# EAGLE board powerlog (EAGLE 6.2)
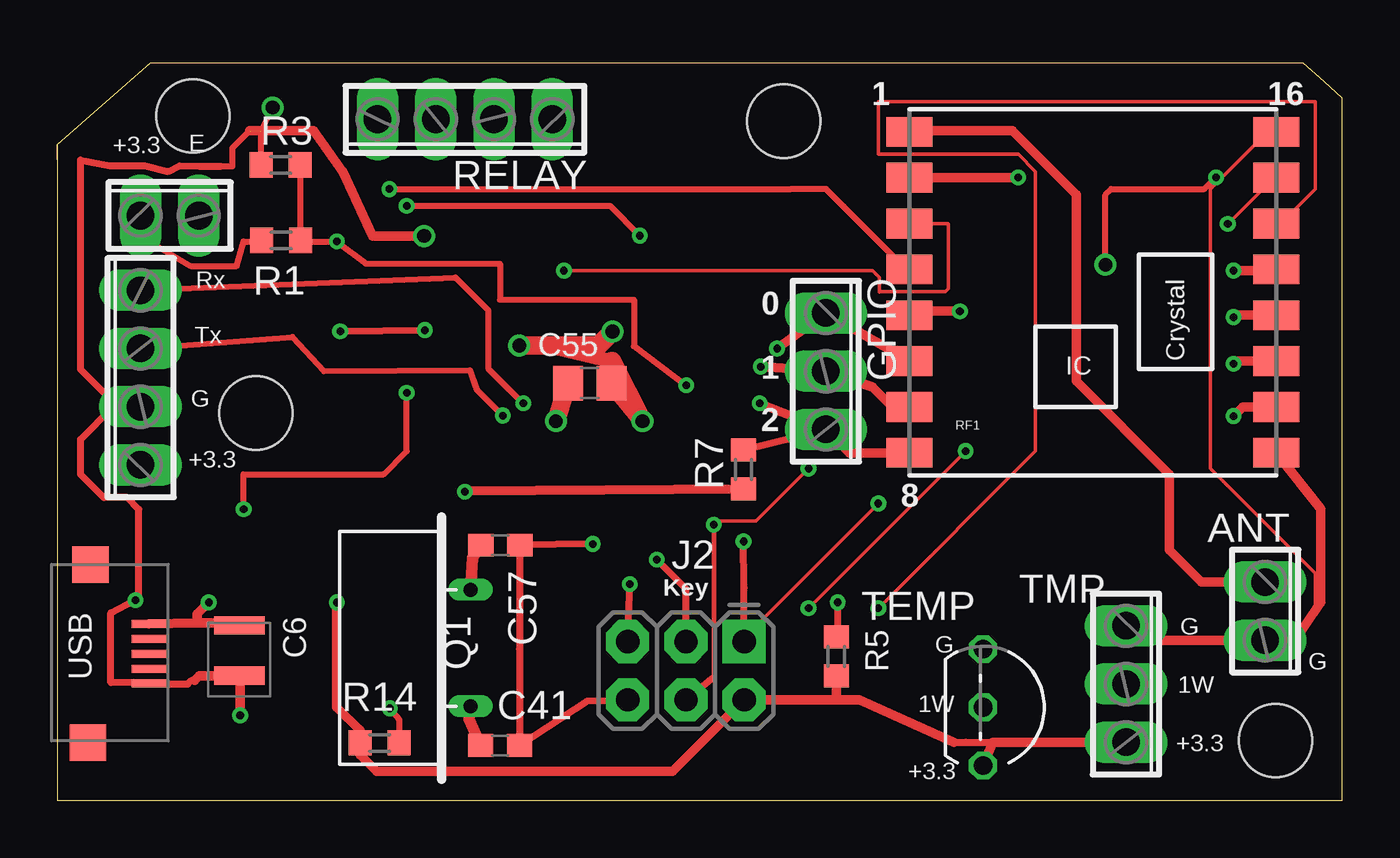
[diagram p0: board, top side]
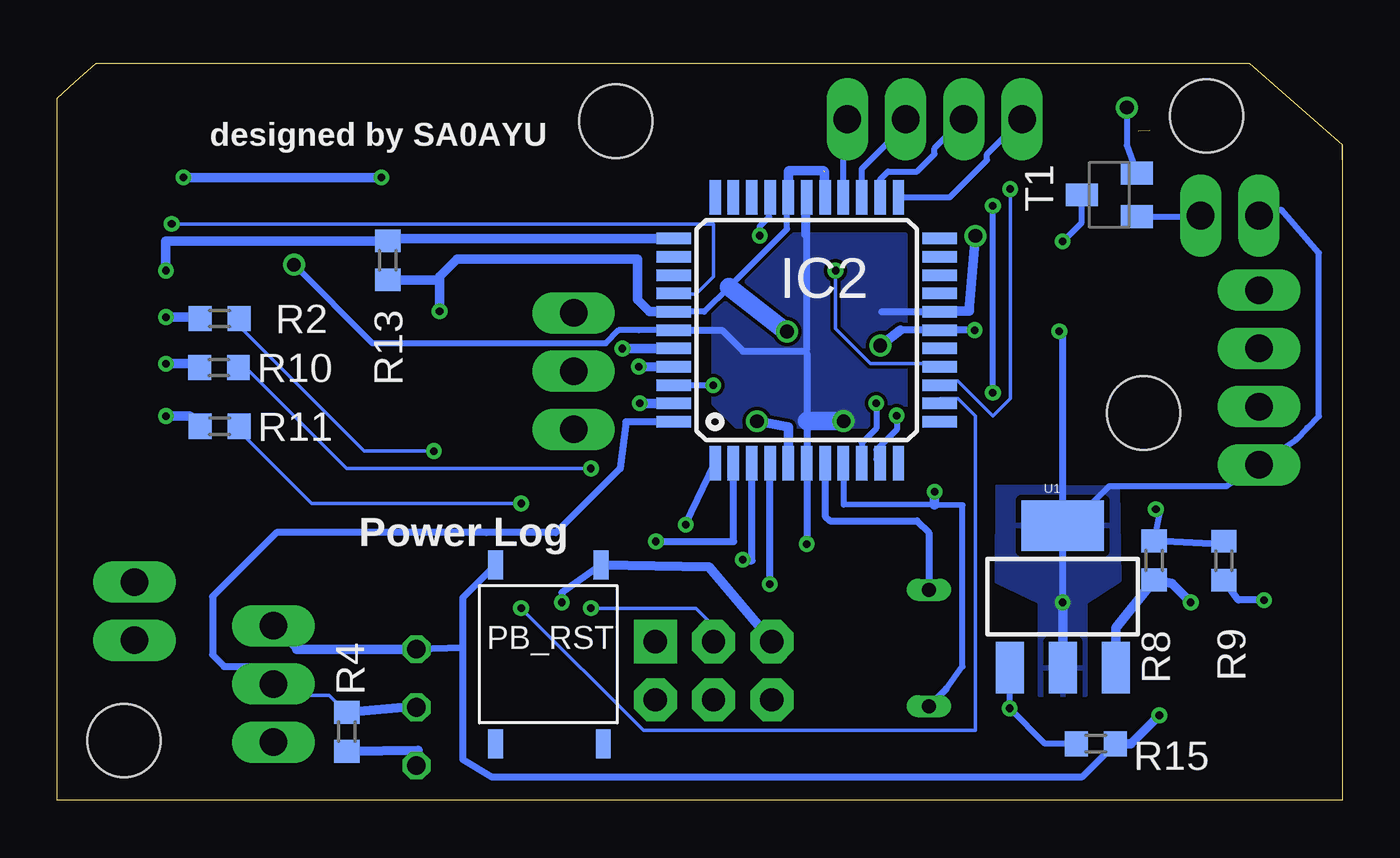
[diagram p1: board, bottom side, seen from below]

Size 56.04 x 32.16 mm. Coordinates in mm from the lower left corner, seen from the top.
Outline: 0,28.62 4.05,32.16 54.34,32.15 55.25,31.34 56.04,30.63 56.04,0 0,0 0,28.62
Outline: 0,28.62 0,27.96 0,28.62
Copper layers (1*16): Top 0.0356mm / dielectric 1.5011mm / Bottom 0.0356mm
Design rules: minimum track width 6mil, minimum drill 13mil, track to track 6mil, track to pad 6mil, pad to pad 6mil, via to via 6mil, smd to smd 6mil, copper to edge 15mil, drill to drill 6mil, minimum pad ring 7mil, minimum via ring 7mil, stop-mask expansion 4mil, vias tented up to drill 0mil, thermal gap 10mil
Holes 3.2 mm at 31.68,29.63 53.14,2.61 8.66,16.9 5.92,29.85

## Footprints (pad centres in the part's own frame; a part is rotated, then mirrored left to right if it is on the bottom)
2POL254 = drill 1.2 long: 1 -1.27,0; 2 1.27,0
SMC_CAP_B = smd 0.8 x 2.2: + -1.37,0.3; - 0.83,0.3
C0603 = smd 1.1 x 1: 1 -0.85,0; 2 0.85,0
C0805 = smd 1.3 x 1.5: 1 -0.95,0; 2 0.95,0
3POL254 = drill 1.2 long: 1 -2.54,0; 2 0,0; 3 2.54,0
TQFP44 = smd 1.5 x 0.5: 1 -5.8,4; 2 -5.8,3.2; 3 -5.8,2.4; 4 -5.8,1.6; 5 -5.8,0.8; 6 -5.8,0; 7 -5.8,-0.8; 8 -5.8,-1.6; 9 -5.8,-2.4; 10 -5.8,-3.2; 11 -5.8,-4; 23 5.8,-4; 24 5.8,-3.2; 25 5.8,-2.4; 26 5.8,-1.6; 27 5.8,-0.8; 28 5.8,0; 29 5.8,0.8; 30 5.8,1.6; 31 5.8,2.4; 32 5.8,3.2; 33 5.8,4 | smd 0.5 x 1.5: 12 -4,-5.8; 13 -3.2,-5.8; 14 -2.4,-5.8; 15 -1.6,-5.8; 16 -0.8,-5.8; 17 0,-5.8; 18 0.8,-5.8; 19 1.6,-5.8; 20 2.4,-5.8; 21 3.2,-5.8; 22 4,-5.8; 34 4,5.8; 35 3.2,5.8; 36 2.4,5.8; 37 1.6,5.8; 38 0.8,5.8; 39 0,5.8; 40 -0.8,5.8; 41 -1.6,5.8; 42 -2.4,5.8; 43 -3.2,5.8; 44 -4,5.8
2X3-NS = drill 1.016 pad 1.88 square: 1 -2.54,-1.27 | drill 1.016 pad 1.88 octagon: 2 -2.54,1.27; 3 0,-1.27; 4 0,1.27; 5 2.54,-1.27; 6 2.54,1.27
PUSHBUTTON = smd 0.635 x 1.27: IN -2.3,4.29; IN2 -2.3,-3.51; OUT 2.3,4.29; OUT2 2.4,-3.51
Q = drill 0.61 long: 1 -2.54,-7.62; 2 2.54,-7.62
R0603 = smd 1 x 1.1: 1 -0.85,0; 2 0.85,0
4POL254 = drill 1.2 long: 1 -3.81,0; 2 -1.27,0; 3 1.27,0; 4 3.81,0
RFM22-XXX-S2 = smd 2 x 1.3: 1 -8,7; 2 -8,5; 3 -8,3; 4 -8,1; 5 -8,-1; 6 -8,-3; 7 -8,-5; 8 -8,-7; 9 8,-7; 10 8,-5; 11 8,-3; 12 8,-1; 13 8,1; 14 8,3; 15 8,5; 16 8,7
SC59_EBC = smd 1 x 1.4: B -0.95,-1.2; C 0,1.2; E 0.95,-1.2
TO92- = drill 0.813 octagon: 1 -2.54,0; 2 0,0; 3 2.54,0
SOT223 = smd 1.219 x 2.235: 1 -2.311,-3.099; 2 0,-3.099; 3 2.311,-3.099 | smd 3.6 x 2.2: 4 0,3.099
USB_MICRO_B = smd 0.35 x 1.5: 1 -0.38,-1.58; 2 -1.03,-1.58; 3 -1.68,-1.58; 4 -2.33,-1.58; 5 -2.98,-1.58 | smd 1.6 x 1.6: 6 -5.55,1.08; 7 2.2,0.97

## Placement (x,y rotation side)
ANT  [2POL254]  52.68,8.26 270 top
C6  4.7uF  [SMC_CAP_B]  7.64,6.27 270 top
C41  33p  [C0603]  19.31,2.39 0 top
C55  1µ  [C0805]  23.22,18.2 180 top
C57  33p  [C0603]  19.32,11.13 0 top
GPIO  [3POL254]  33.52,18.72 270 top
IC2  ATMEGA644-PUTQFP44  [TQFP44]  23.36,20.51 90 bottom
J2  AVR_SPI_PRG_6NS  [2X3-NS]  27.42,5.66 180 top
PB_RST  PUSHBUTTON  [PUSHBUTTON]  34.63,5.98 0 bottom
PHOTO  [2POL254]  4.9,25.51 0 top
Q1  3.6864 MHz  [Q]  10.41,6.64 90 top
R1  10k  [R0603]  9.77,24.43 180 top
R2  0  [R0603]  48.96,21.02 0 bottom
R3  270k  [R0603]  9.74,27.72 0 top
R4  2k4  [R0603]  43.41,3 270 bottom
R5  2k4  [R0603]  33.98,6.29 270 top
R7  0  [R0603]  29.93,14.44 90 top
R8  10k  [R0603]  8.2,10.47 270 bottom
R9  5k1  [R0603]  5.16,10.46 90 bottom
R10  0  [R0603]  48.99,18.89 0 bottom
R11  0  [R0603]  48.97,16.32 0 bottom
R13  2k  [R0603]  41.62,23.56 90 bottom
R14  390  [R0603]  14.06,2.51 180 top
R15  680  [R0603]  10.75,2.47 180 bottom
RELAY  [4POL254]  17.78,29.72 180 top
RF1  RFM22SMD  [RFM22-XXX-S2]  45.17,22.16 0 top
RS-232  [4POL254]  3.63,18.44 90 top
T1  [SC59_EBC]  10.16,26.42 90 bottom
TEMP  DS18S20T  [TO92-]  40.38,4.06 270 top
TMP  0  [3POL254]  46.62,5.08 270 top
U1  V_REG_317SMD  [SOT223]  12.19,8.89 0 bottom
USB  USB_MICRO_B  [USB_MICRO_B]  2.41,8.08 90 top

## Library data of the parts
ANT GPIO PHOTO RELAY RS-232 TMP = con-phoenix-254; OC_FARNELL: unknown; OC_NEWARK: unknown
C6 PB_RST T1 USB = jockes_lib
C41 C55 C57 = rcl
IC2 = atmel
J2 RF1 U1 = SparkFun
Q1 = special
R1-R5 R7-R11 R13-R15 = resistor
TEMP = maxim

## Nets
1W_DATA: IC2.44 R4.1 TEMP.2 TMP.2
+3V3: C55.1 IC2.5 IC2.17 IC2.27 IC2.29 IC2.38 J2.2 PHOTO.1 R1.2 R4.2 R5.2 R13.1 R14.2 RF1.5 RS-232.1 TEMP.3 TMP.3 U1.2 U1.4
+5V: C6.+ R8.2 U1.3 USB.1
AGND: ANT.2 C6.- C41.2 C55.2 C57.2 IC2.6 IC2.18 IC2.28 IC2.39 J2.6 PB_RST.IN R3.1 R9.1 R15.1 RF1.2 RF1.9 RF1.16 RS-232.2 T1.E TEMP.1 TMP.1 USB.5
AVR_RX: IC2.9 RS-232.4
AVR_TX: IC2.10 RS-232.3
CS_N: IC2.34 R13.2 RF1.13
GPIO0: GPIO.1 IC2.40 RF1.6
GPIO1: GPIO.2 IC2.41 RF1.7
GPIO2: GPIO.3 IC2.43 R7.2 RF1.8
IRQ_N: IC2.13 RF1.14
MISO: IC2.2 J2.1 R11.2
MOSI: IC2.1 J2.4 R10.2
N$1: ANT.1 RF1.1
N$2: IC2.26 RELAY.1
N$3: IC2.25 RELAY.2
N$4: IC2.24 RELAY.3
N$5: IC2.23 RELAY.4
N$6: R14.1 R15.2 U1.1
PHOTO_E: PHOTO.2 T1.B
PULSE_N: IC2.42 R1.1 R3.2 T1.C
RESET: IC2.4 J2.5 PB_RST.OUT R5.1
RXANT: IC2.15 RF1.3
SCK: IC2.3 J2.3 R2.2
SCLK: R2.1 RF1.12
SDI: R10.1 RF1.11
SDN: IC2.37 RF1.15
SDO: R11.1 RF1.10
TXANT: IC2.14 RF1.4
VREF: IC2.30 R8.1 R9.2
XTAL1: C41.1 IC2.8 Q1.1 R7.1
XTAL2: C57.1 IC2.7 Q1.2

## Tracks (layer width: path | path; a pad name or v marks a point on that pad's centre or on a via)
1W_DATA
  Bottom 0.152: R4.1 43.43,3.81 44.2,4.57 46.48,4.57 TMP.2
  Bottom 0.305: IC2.44 30.73,16.51 31.24,16.51 31.5,14.48 34.29,11.68 37.34,11.68 46.48,11.68 49.28,8.89 49.28,6.35 48.77,5.84 47.38,5.84 TMP.2
  Bottom 0.406: R4.1 40.45,4.1 TEMP.2
+3V3  (via drill 0.33, 0.6)  (1 unrouted)
  Top 0.152: TEMP.3 40.39,2.03
  Top 0.254: PHOTO.1 3.63,24.62 5.82,23.32 7.82,23.32 8.13,24.38 8.88,24.38 R1.2
  Top 0.305: v24.21,20.46 24.52,20.3 | 40.81,2.53 39.62,2.53 39.12,2.54 | v12.34,20.47 v16.03,20.51
  Top 0.406: TMP.3 40.81,2.53 TEMP.3 | 33.98,4.39 R5.2 | 33.98,4.39 J2.2 26.84,1.27 23.2,1.27 13.92,1.27 13.21,1.98 R14.2 13.21,3.04 12.19,4.06 v12.19,8.64 | 33.98,4.39 34.98,4.39 39.12,2.54 | v39.37,21.34 37.34,21.34 RF1.5
  Top 0.61: 21.35,19.85 24.19,19.16
  Top 0.813: v20.15,19.85 21.35,19.85 23.6,19.85 v24.21,20.46 | 24.19,19.16 v25.53,16.54 C55.1
  Bottom 0.254: IC2.38 27.83,21.31 26.75,22.39 24.21,24.93 24.21,26.26 IC2.29 | v12.19,8.64 12.19,11.68 10.16,13.72 5.05,13.72 RS-232.1 2.01,15.75 1.52,16.26 1.02,16.76 1.02,23.88 2.65,25.76 PHOTO.1
  Bottom 0.305: v24.21,20.46 24.47,20.61 | v12.34,20.47 12.19,20.32 v12.19,8.64 | 19.26,20.51 17.55,20.51 IC2.17 v16.03,20.51
  Bottom 0.406: 19.26,20.51 v20.15,19.85 | IC2.29 24.16,27.45 24.13,27.48 22.63,27.48 | 22.58,27.43 22.58,26.34 IC2.27 | R4.2 40.31,2.17 TEMP.3 | IC2.5 24.16,16.28 v25.53,16.54 | v12.19,8.64 U1.2 | IC2.38 30.21,21.31 30.73,21.84 30.73,23.62 38.61,23.62 39.37,22.86 | 39.37,22.86 v39.37,21.34 | R13.1 39.37,22.71 39.37,22.86
  Bottom 0.813: 24.47,20.61 26.75,22.39
  pour Bottom: 13.21,4.57 13.21,8.64 15.09,9.52 15.06,13.72 9.75,13.67 9.7,9.6 11.18,8.64 11.18,4.57
+5V  (via drill 0.33)
  Top 0.406: USB.1 6.1,7.75 | 6.1,7.75 7.83,7.75 C6.+ | v6.6,8.64 6.1,8.13 6.1,7.75
  Bottom 0.406: v6.6,8.64 7.43,9.46 R8.2 9.88,7.53 U1.3
AGND  (via drill 0.33, 0.6, 0.6 pad 0.3)  (1 unrouted)
  Top 0.152: RF1.16 52.58,28.96 50.29,26.67 50.29,14.48 54.86,9.91 54.86,8.38 54.92,8.34
  Top 0.254: v45.72,23.37 45.72,26.42 45.97,26.67 50.04,26.67 v50.55,27.18 | 7.14,27.66 7.65,27.66 7.65,28.47 8.13,28.96 8.38,29.21 | 8.89,28.2 R3.1 8.89,29.21 v9.4,30.23
  Top 0.305: 5.99,5.23 5.84,5.23 5.69,5.08 4.7,5.08 USB.5 3.34,5.15 2.34,5.13 2.34,8.18 v3.4,8.74 3.56,8.89 3.56,12.7 3.05,13.21 2.03,13.21 1.02,14.22 1.02,15.75 2.44,17.17 | 2.44,17.17 RS-232.2 | 2.44,17.17 2.13,17.68 1.02,18.8 1.02,27.94 2.29,27.69 3.81,27.69 4.83,27.43 5.33,27.69 6.2,27.66 7.14,27.66 | v23.36,11.18 C57.2 20.16,6.61 C41.2 23.13,4.34 J2.6
  Top 0.406: v7.98,3.71 7.98,5.4 C6.- 6.2,5.44 5.99,5.23 | TMP.1 47.25,6.99 ANT.2 53.98,6.99 54.92,8.34 55.12,8.64 55.12,12.71 RF1.9 | RF1.2 41.9,27.16 v41.91,27.18 | v16,24.62 13.76,24.62 12.46,27.42 12.45,27.43 11.18,29.21 8.38,29.21
  Top 0.813: v21.75,16.54 C55.2
  Bottom 0.254: IC2.39 30.68,20.51 31.56,20.51 32.13,19.94 42.29,19.94 v45.72,23.37 | v9.4,30.23 9.4,28.57 T1.E
  Bottom 0.305: 20.09,21.31 IC2.18 | 23.45,24.67 23.45,26.22 IC2.28 23.36,19.69 23.45,19.59 | 23.45,19.59 26.14,19.59 27.06,20.51 IC2.39 | 23.45,19.59 23.36,19.5 23.36,16.56 IC2.6 v23.36,11.18 | 38.35,6.65 TEMP.1 | v3.4,8.74 4.52,8.74 R9.1 | 8.96,27.64 T1.E | 38.35,6.65 38.35,1.78 37.08,1.02 11.36,1.02 R15.1 | 45.6,6.6 TMP.1 | 38.35,6.65 38.35,8.84 PB_RST.IN
  Bottom 0.406: TMP.1 | R15.1 9.21,2.47 v7.98,3.71 | 45.6,6.6 TEMP.1 | v41.91,27.18 v50.55,27.18 | v16,24.62 16.26,21.59 16.26,21.34 17.53,21.34 IC2.18
  Bottom 0.813: 23.36,16.56 v21.75,16.54
  pour Bottom: 19.05,24.69 25.65,24.69 27.43,24.18 27.43,17.32 26.42,16.3 19.56,16.3 19.05,16.81
AVR_RX  (via drill 0.33)
  Top 0.254: RS-232.4 17.37,22.81 18.8,21.38 18.8,18.84 v20.32,17.32
  Bottom 0.152: IC2.9 20.83,15.03
  Bottom 0.254: v20.32,17.32 20.32,16.23 20.96,15.59 IC2.9 | IC2.9
AVR_TX  (via drill 0.33)
  Top 0.254: RS-232.3 10.26,20.22 11.63,18.72 17.98,18.77 18.29,17.93 v19.43,16.79
  Bottom 0.254: v19.43,16.79 19.43,16.18 20.32,15.29 20.32,14.88 IC2.10
CS_N  (via drill 0.33)
  Top 0.406: v51.31,23.11 53.12,23.11 RF1.13
  Bottom 0.406: 51.28,23.14 v51.31,23.11 51.31,24.41 R13.2 41.63,24.51 IC2.34
GPIO0  (via drill 0.33)
  Top 0.406: v31.39,19.71 GPIO.1 RF1.6
  Bottom 0.406: IC2.40 v31.39,19.71
GPIO1  (via drill 0.33)
  Top 0.406: RF1.7 36.43,17.16 35.56,18.03 GPIO.2 v30.68,18.92
  Bottom 0.406: IC2.41 v30.68,18.92
GPIO2  (via drill 0.33)
  Top 0.305: R7.2 GPIO.3
  Top 0.406: RF1.8 34.54,15.16 GPIO.3 v30.63,17.32
  Bottom 0.406: IC2.43 v30.63,17.32
IRQ_N  (via drill 0.33)
  Top 0.152: v35.81,8.38 42.67,15.24 42.67,27.43 41.91,28.19 35.81,28.19 35.81,30.48 54.86,30.48 54.86,26.67 53.34,25.15 RF1.14
  Bottom 0.152: v35.81,8.38 30.48,3.05 16,3.05 16,16.76 16.76,17.53 17.53,17.53 IC2.13
MISO  (via drill 0.33)
  Top 0.152: v35.81,12.95 30.48,7.62 J2.1
  Top 0.305: v29.93,11.3 29.95,9.37 29.95,9.28 J2.1
  Bottom 0.152: v35.81,12.95 44.96,12.95 48.01,16 R11.2
  Bottom 0.305: v29.93,11.3 26.55,11.3 26.55,11.29 26.55,14.71 IC2.2
MOSI  (via drill 0.33)
  Top 0.152: v32.77,14.48 30.48,12.19 28.96,12.19 v28.63,12.03
  Top 0.203: 28.64,5.38 v28.63,12.03
  Top 0.305: J2.4 28.64,5.38
  Bottom 0.152: v32.77,14.48 43.43,14.48 48.01,19.05 R10.2
  Bottom 0.305: v28.63,12.03 IC2.1
N$1
  Top 0.406: ANT.1 49.91,9.53 48.51,10.92 48.51,14.22 44.45,18.29 44.45,26.42 41.66,29.21 37.22,29.21 RF1.1
N$2
  Bottom 0.254: IC2.26 21.76,29.55 RELAY.1
N$3
  Bottom 0.254: IC2.25 20.96,27.56 19.81,28.7 19.81,28.96 RELAY.2
N$4
  Bottom 0.254: IC2.24 20.16,27.09 19.81,27.43 18.54,27.43 17.78,28.19 17.78,28.45 RELAY.3
N$5
  Bottom 0.254: IC2.23 17.12,26.31 15.49,27.94 15.49,28.19 RELAY.4
N$6  (via drill 0.33)
  Top 0.254: R14.1 14.91,3.53 v14.5,4.01
  Bottom 0.254: U1.1 v14.5,4.01 12.96,2.47 R15.2
PHOTO_E
  Bottom 0.254: T1.B 6.97,25.47 PHOTO.2
PULSE_N  (via drill 0.33)
  Top 0.254: R3.2 10.62,27.69 R1.1 10.66,24.38 v12.19,24.38 13.46,23.42 19.3,23.42 19.3,21.84 25.15,21.84 25.15,19.81 v27.43,18.11
  Bottom 0.254: T1.C 11.36,25.22 v12.19,24.38 | v27.43,18.11 29.15,18.11 IC2.42
RESET  (via drill 0.33)
  Top 0.305: J2.5 v24.97,9.43 | R5.1 34.04,7.14 v34.04,8.64
  Bottom 0.305: IC2.4 24.96,9.45 v24.97,9.43 | v34.04,8.64 34.04,9.07 PB_RST.OUT
  Bottom 0.406: PB_RST.OUT 27.62,10.19 J2.5
RXANT  (via drill 0.33)
  Top 0.152: v22.1,23.11 22.61,23.11 26.92,23.11 30.48,23.11 35.56,23.11 35.87,22.81 35.87,22.17 35.89,22.2 38.74,22.2 38.86,22.33 38.86,25.15 38.84,25.16 RF1.3 36.58,25.15
  Bottom 0.152: v22.1,23.11 22.1,20.57 20.57,19.05 18.29,19.05 IC2.15
SCK  (via drill 0.33)
  Top 0.152: v32.77,8.38 v39.62,15.24
  Top 0.305: v26.14,10.5 27.41,9.23 J2.3
  Bottom 0.152: v39.62,15.24 42.67,15.24 48.01,20.57 R2.2 | v32.77,8.38 28.19,8.38 27.43,7.62 J2.3
  Bottom 0.305: v26.14,10.5 25.99,10.45 25.74,10.45 25.74,14.7 IC2.3
SCLK  (via drill 0.33)
  Top 0.406: RF1.12 51.39,21.16 v51.31,21.08
  Bottom 0.406: v51.31,21.08 49.87,21.08 R2.1
SDI  (via drill 0.33)
  Top 0.406: RF1.11 51.42,19.16 v51.31,19.05
  Bottom 0.406: v51.31,19.05 50.01,19.05 R10.1
SDN  (via drill 0.33)
  Top 0.152: v51.05,25.15 52.58,26.67 RF1.15
  Bottom 0.152: v51.05,25.15 27.43,25.15 27.43,22.86 28.19,22.1 28.96,22.1 IC2.37
SDO  (via drill 0.33)
  Top 0.406: RF1.10 51.71,17.16 v51.31,16.76
  Bottom 0.406: v51.31,16.76 50.26,16.76 R11.1
TXANT  (via drill 0.33 pad 0.3)
  Top 0.152: 36.58,23.62 36.7,23.53 RF1.4
  Top 0.254: v14.48,26.67 32,26.67 33.53,26.67 34.29,25.91 36.67,23.53 36.7,23.53
  Bottom 0.152: v14.48,26.67 14.48,17.53 15.24,16.76 16.76,18.29 17.53,18.29 IC2.14
VREF  (via drill 0.33)
  Top 0.254: v8.13,12.7 8.13,14.22 14.22,14.22 15.24,15.24 v15.24,17.78 | v15.24,25.94 24.1,25.94 v25.4,24.64
  Bottom 0.254: R8.1 7.95,12.52 v8.13,12.7 | v15.24,17.78 v15.24,25.94 | 24.89,26.38 IC2.30 24.99,25.45 25.4,25.04 v25.4,24.64
  Bottom 0.305: R8.1 5.25,11.16 R9.2
XTAL1  (via drill 0.33)
  Top 0.406: R7.1 17.82,13.51 v17.78,13.46
  Top 0.508: C41.1 17.97,3.53 Q1.1
  Bottom 0.254: 17.27,4.87 16.56,5.84 16.56,12.87 17.78,12.88 21.74,12.9 21.74,14.7 IC2.8
  Bottom 0.305: IC2.8 21.74,14.7 21.67,14.63 | 17.27,4.87 17.27,4.86 Q1.1
  Bottom 0.406: v17.78,13.46 17.78,12.88
XTAL2
  Top 0.508: C57.1 18.11,10.58 Q1.2
  Bottom 0.305: IC2.7 22.56,12.39 22.35,12.19 18.54,12.19 18.03,11.68 Q1.2

## Text on the board
tNames: 1 | 16 | +3.3 | E | Rx | 0 | Tx | 1 | G | 2 | +3.3 | 8 | Key | G | G | G | 1W | 1W | +3.3 | +3.3
bNames: designed by SA0AYU | Power Log